# Altium PCB PR2019-DataAcquisitionSystem.PcbDoc
Units mm, origin at the board's own origin, x right, y up, seen from the top; angles counter-clockwise.
Board outline 36.7 x 28.3 mm, 2 copper layers (Top Layer, Bottom Layer), stack 1.569 mm thick; 52 components, 40 nets, 182 pads, 70 vias.
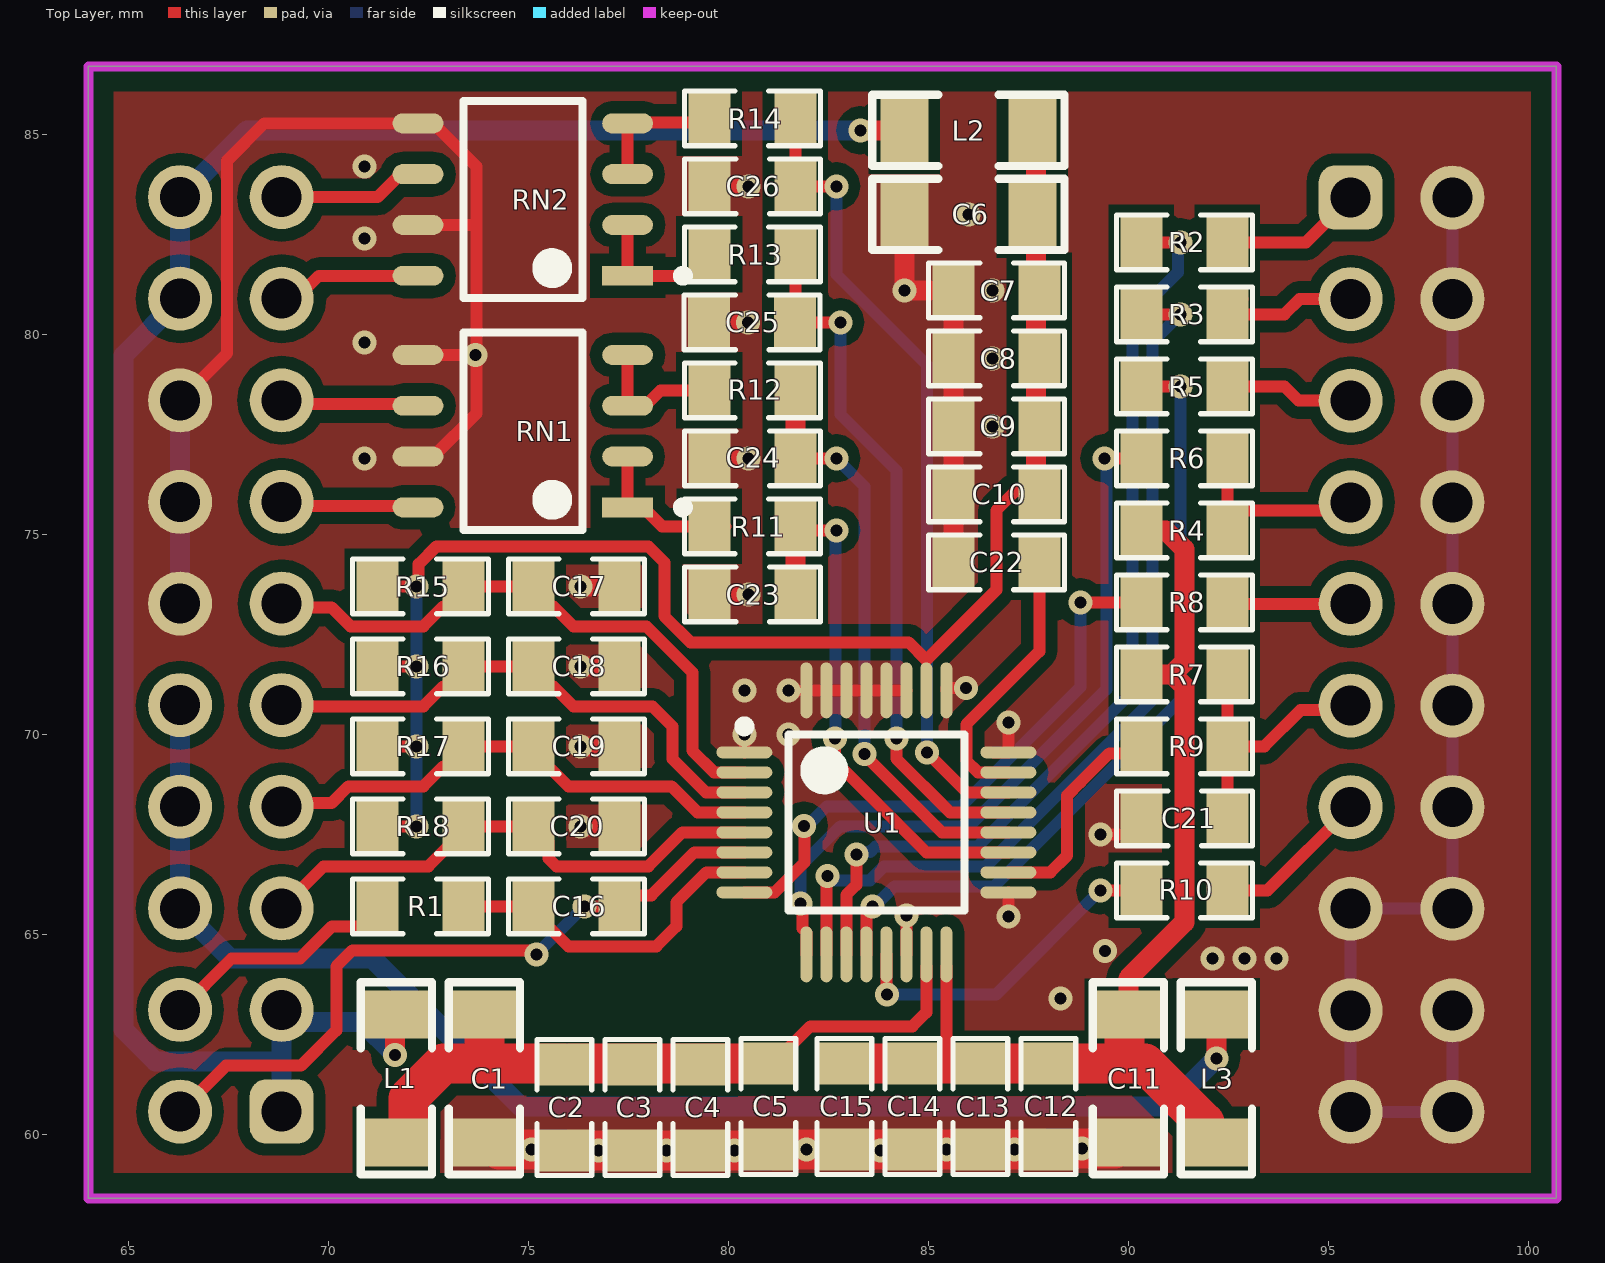
[diagram p0: Top Layer view]
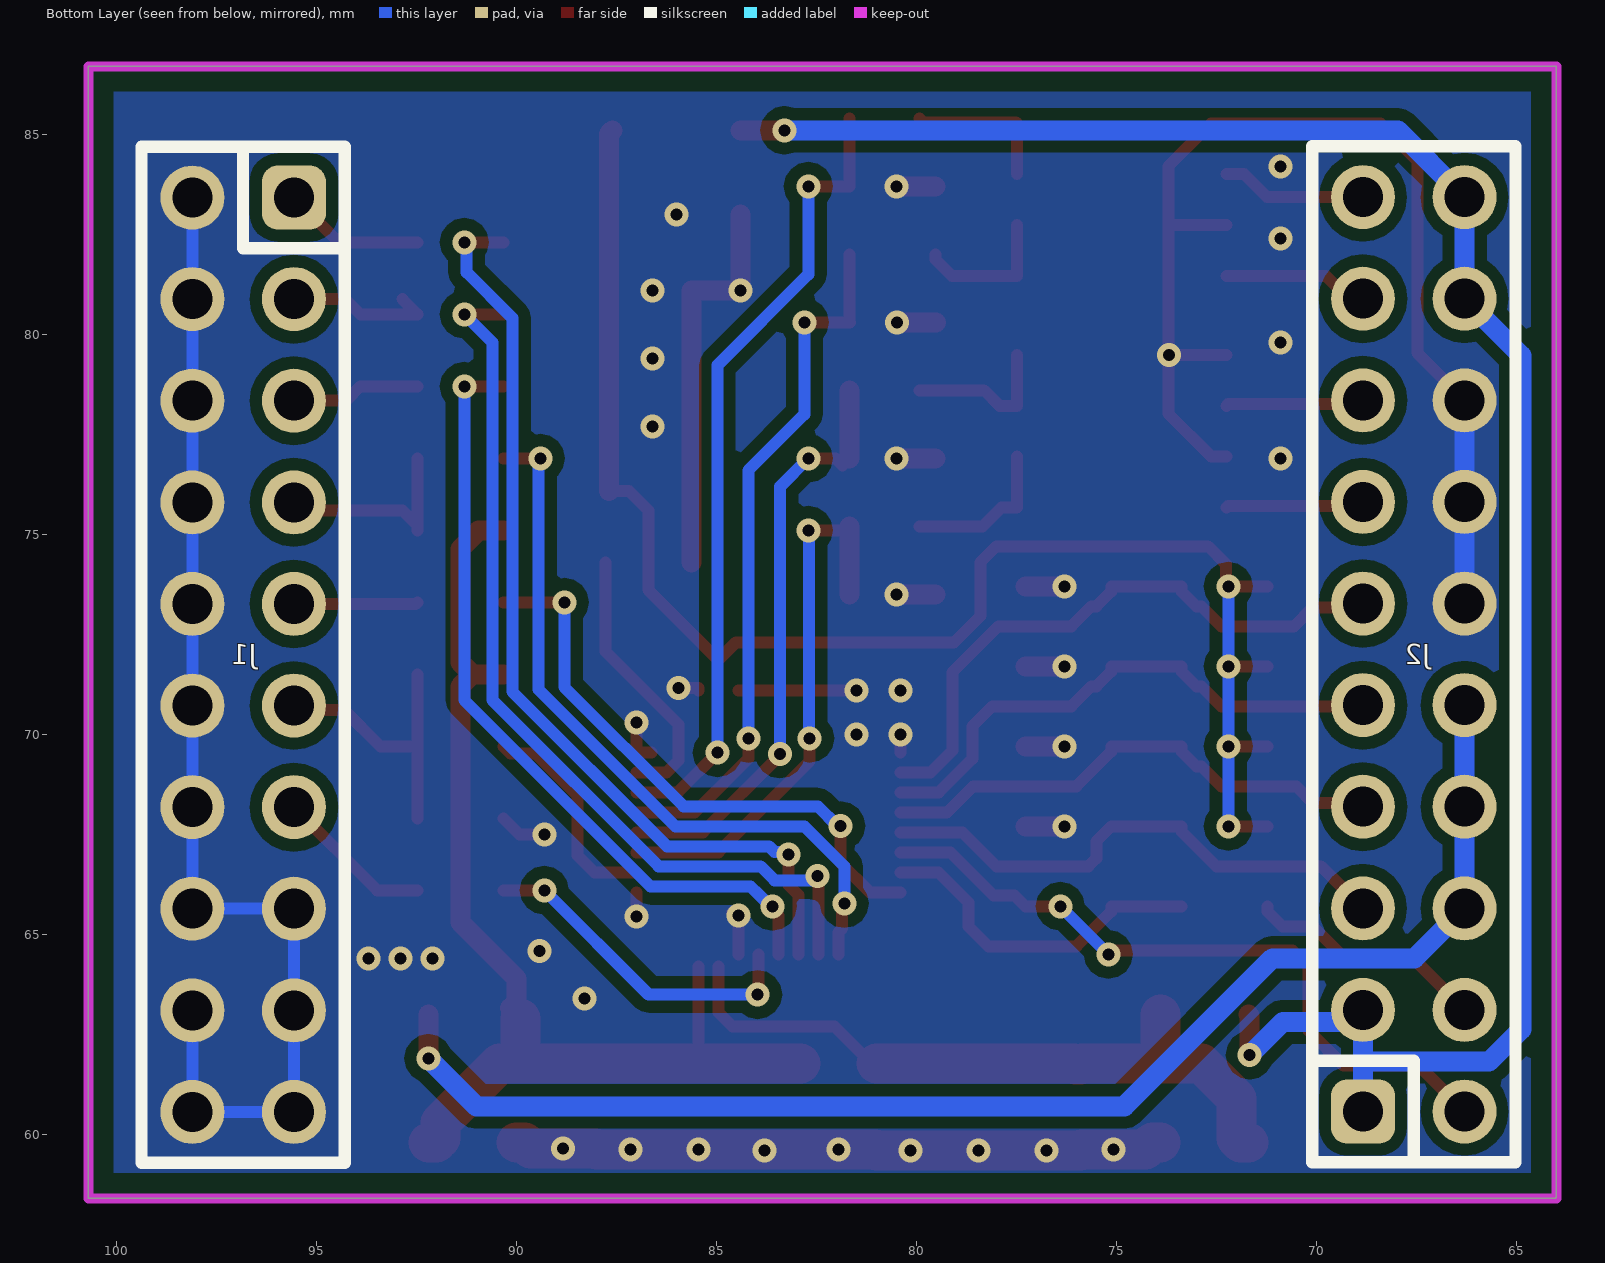
[diagram p1: Bottom Layer view, seen from below]
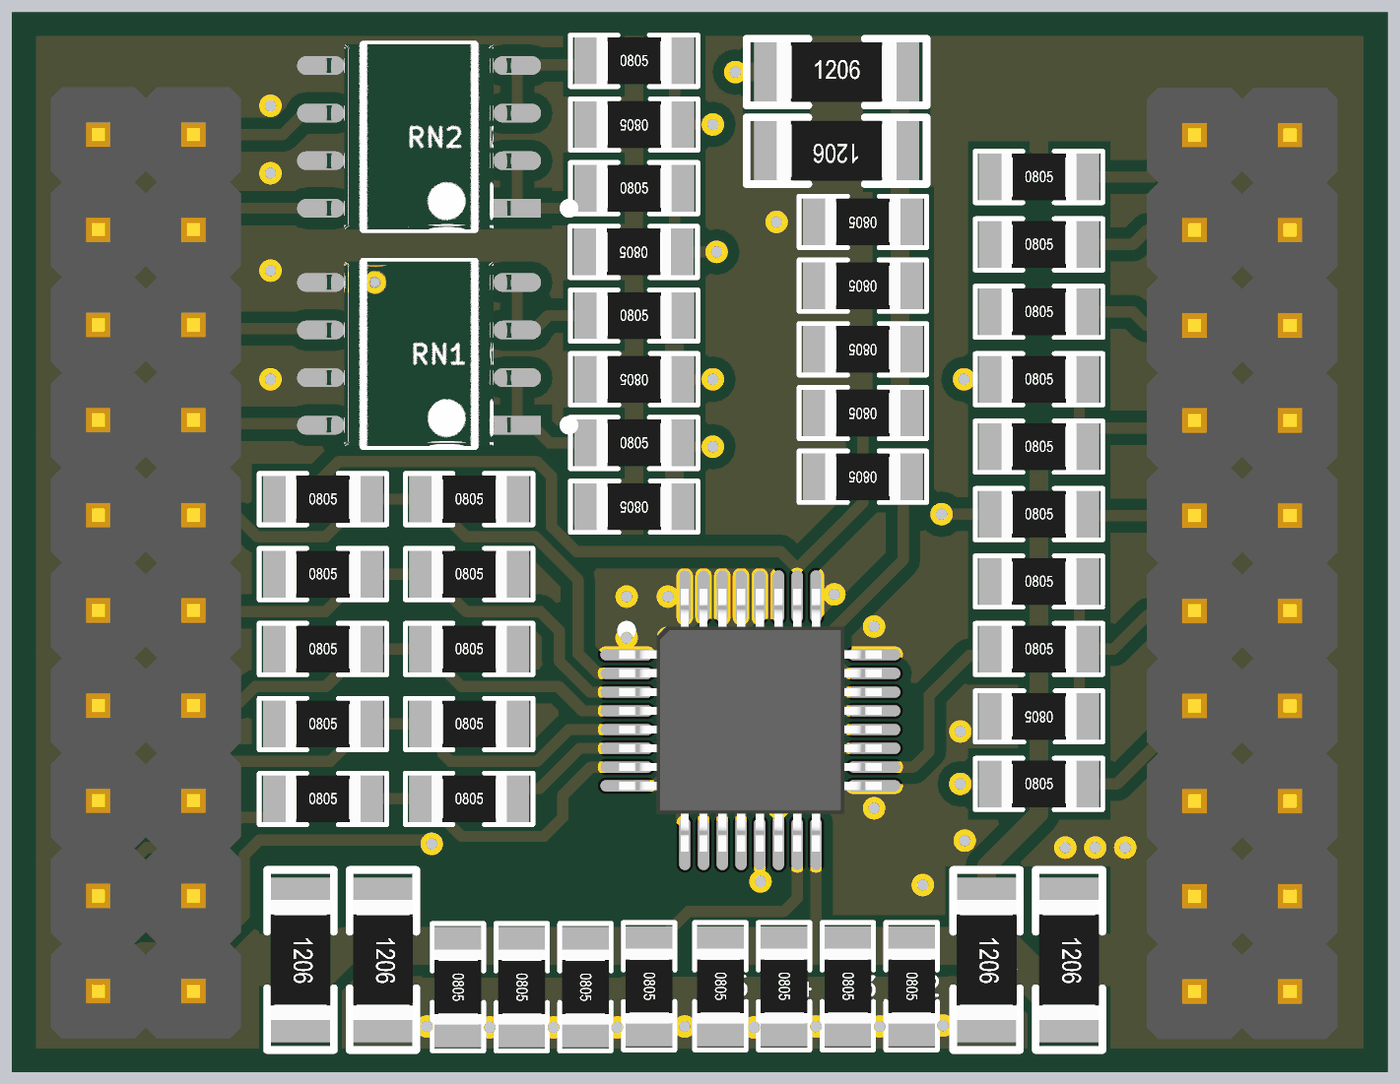
[diagram p2: 3D render of the assembled board from above, using the file's embedded part models]

## Layer stack, top to bottom
Top Solder: solder mask 0.0254, SM-001, Dk 4
Top Layer: signal copper 0.035
Dielectric 1: core 1.4986, Core-043, Dk 4.3
Bottom Layer: signal copper 0.035
Bottom Solder: solder mask 0.0254, SM-001, Dk 4

## Board outline
64,58.4 100.7,58.4 100.7,86.7 64,86.7

## Design rules (kind name [scope] priority, off if disabled: settings)
Clearance Keep-Poly [(OnLayer('Keep-Out Layer')) vs (InPoly)] p1: gap=0.5 ignorepadtopadclearanceinfootprint=FALSE
Clearance Polygon [All vs (InPoly)] p2: gap=0.3 ignorepadtopadclearanceinfootprint=FALSE
Clearance Keepout [All vs (OnLayer('Keep-Out Layer'))] p3: gap=0.5 ignorepadtopadclearanceinfootprint=FALSE
Clearance [All] p4: gap=0.2 ignorepadtopadclearanceinfootprint=FALSE
ComponentClearance [All] p1: gap=0.1 collisioncheckmode=3 verticalgap=0.2 showdistances=FALSE
FabricationTestPointUsage TestPointUsage [All] p1: valid=0 allowmultiple=FALSE
FabricationTestpoint Testpoint [All] p1: side=3 testpointundercomponent=TRUE minsize=1.016 maxsize=2.54 preferedsize=1.524 minholesize=0 maxholesize=1.016 preferedholesize=0.813 testpointgrid=0.025 allowsidetop=TRUE allowsidebottom=TRUE usegrid=TRUE gridtolerance=0
HoleSize [All] p1: absolutevalues=TRUE maxlimit=3.5 minlimit=0 maxpercent=80.000 minpercent=20.000
PlaneConnect [All] p1: planeconnectstyle=Direct reliefexpansion=0.508 reliefentries=4 reliefconductorwidth=0.254 reliefairgap=0.254
PolygonConnect PolygonConnect_1 [InNet('BAT+')] p1: connectstyle=Direct reliefconductorwidth=0.254 reliefentries=4 polygonreliefangle="90 Angle" airgapwidth=0.254
PolygonConnect [All] p2: connectstyle=Direct reliefconductorwidth=0.8 reliefentries=4 polygonreliefangle="90 Angle" airgapwidth=0.254
RoutingVias [All] p1: holewidth=0.3 width=0.6 viastyle="Through Hole" minholewidth=0.3 minwidth=0.6 maxholewidth=0.8 maxwidth=1.3
SolderMaskExpansion [(IsVia)] p1: expansion=-10 istentingtop=FALSE
Width SGND [InNet('SGND')] p1: maxlimit=2 minlimit=0.3 preferedwidth=0.5 minimp=50.000000 maximp=50.000000 favimp=50.000000
Width PGND [InNet('PGND')] p2: maxlimit=3 minlimit=0.5 preferedwidth=0.5 minimp=50.000000 maximp=50.000000 favimp=50.000000
Width [All] p3: maxlimit=2 minlimit=0.2 preferedwidth=0.2 minimp=50.000000 maximp=50.000000 favimp=50.000000
25 further rules are at their usual default settings.

## Components (designator, comment, footprint, x,y, rotation, side; value= is the part's Value field where it differs from the comment)
C1 "10uF X7R 50V" 1206 73.9,61.4 r270 top
C2 "100nF X7R 100V" 0805 75.9,60.675 r270 top
C3 "1nF X7R 50V" 0805 77.6,60.675 r270 top
C4 "100pF C0G 50V" 0805 79.3,60.675 r270 top
C5 "10pF C0G" 0805 81,60.7 r270 top
C6 "10uF X7R 50V" 1206 86,83 r180 top
C7 "100nF X7R 100V" 0805 86.7,81.1 r180 top
C8 "1nF X7R 50V" 0805 86.7,79.4 r180 top
C9 "100pF C0G 50V" 0805 86.7,77.7 r180 top
C10 "10pF C0G" 0805 86.7,76 r180 top
C11 "10uF X7R 50V" 1206 90,61.4 r270 top
C12 "100nF X7R 100V" 0805 88,60.7 r270 top
C13 "1nF X7R 50V" 0805 86.3,60.7 r270 top
C14 "100pF C0G 50V" 0805 84.6,60.7 r270 top
C15 "10pF C0G" 0805 82.9,60.7 r270 top
C16 "1nF X7R 50V" 0805 76.2,65.7 r0 top
C17 "1nF X7R 50V" 0805 76.2,73.7 r0 top
C18 "1nF X7R 50V" 0805 76.2,71.7 r0 top
C19 "1nF X7R 50V" 0805 76.2,69.7 r0 top
C20 "1nF X7R 50V" 0805 76.2,67.7 r0 top
C21 "100nF X7R 100V" 0805 91.4,67.9 r180 top
C22 "47uF X5R 6.3V" 0805 86.7,74.3 r180 top
C23 "1nF X7R 50V" 0805 80.6,73.5 r180 top
C24 "1nF X7R 50V" 0805 80.6,76.9 r180 top
C25 "1nF X7R 50V" 0805 80.587,80.3 r180 top
C26 "1nF X7R 50V" 0805 80.6,83.7 r180 top
J1 "ToMainBoard" IDC-20 96.83,71.99 r270 bottom
J2 "FromMainBoard" IDC-20 67.564,72 r90 bottom
L1 "80R 3A" 1206 71.7,61.4 r270 top
L2 "80R 3A" 1206 86,85.1 r0 top
L3 "80R 3A" 1206 92.2,61.4 r270 top
R1 "4K7" 0805 72.3,65.7 r0 top
R2 "47R" 0805 91.4,82.3 r0 top
R3 "47R" 0805 91.4,80.5 r0 top
R4 "100K" 0805 91.4,75.1 r0 top
R5 "47R" 0805 91.4,78.7 r0 top
R6 "47R" 0805 91.4,76.9 r0 top
R7 "100K" 0805 91.4,71.5 r0 top
R8 "47R" 0805 91.4,73.3 r0 top
R9 "47R" 0805 91.4,69.7 r0 top
R10 "47R" 0805 91.4,66.1 r0 top
R11 "4K7" 0805 80.6,75.2 r0 top
R12 "4K7" 0805 80.6,78.6 r0 top
R13 "4K7" 0805 80.6,82 r0 top
R14 "4K7" 0805 80.6,85.4 r0 top
R15 "10K" 0805 72.3,73.7 r0 top
R16 "10K" 0805 72.3,71.7 r0 top
R17 "10K" 0805 72.3,69.7 r0 top
R18 "10K" 0805 72.3,67.7 r0 top
RN1 "AORN100-1AT5" FP-AORN100-1AT5-IPC_C 74.862,77.58 r180 top value=1/100kΩ
RN2 "AORN100-1AT5" FP-AORN100-1AT5-IPC_C 74.862,83.37 r180 top value=1/100kΩ
U1 "ADS124S08IPBSR" LQFP-32_N 83.7,67.8 r0 top

## Footprints (in the part's own frame and the unit in brackets; to place one, negate y for a bottom-side part, rotate by r counter-clockwise, add the part's x,y. Pads: shape width x height; smd on the part's side, far side on the other; paste and mask are expansions set on the pad)
0805 [mm]
  rect 1.05x1.3 smd: 1(-1.075,0) 2(1.075,0)
  silkscreen extent -1.7,-0.69 1.7,0.69, body extent -1,-0.62 1,0.63, height 0.5
1206 [mm]
  rect 1.2x1.6 smd: 1(-1.6,0) 2(1.6,0)
  silkscreen extent -2.4,-0.89 2.4,0.89, body extent -1.6,-0.8 1.6,0.8, height 0.6
FP-AORN100-1AT5-IPC_C [mm]
  rect 1.269x0.499 smd paste+0 mask+0: 1(-2.62,1.905)
  rrect100% 1.269x0.499 smd paste+0 mask+0: 2(-2.62,0.635) 3(-2.62,-0.635) 4(-2.62,-1.905) 5(2.62,-1.905) 6(2.62,-0.635) 7(2.62,0.635) 8(2.62,1.905)
  silkscreen extent -4.13,-2.46 1.49,2.46, body extent -3.35,-2.57 3.35,2.57, height 0.25
IDC-20 [mm]
  rrect50% 1.6x1.6 hole 1: 1(-11.43,1.27)
  round 1.6 hole 1: 2(-11.43,-1.27) 3(-8.89,1.27) 4(-8.89,-1.27) 5(-6.35,1.27) 6(-6.35,-1.27) 7(-3.81,1.27) 8(-3.81,-1.27) 9(-1.27,1.27) 10(-1.27,-1.27) 11(1.27,1.27) 12(1.27,-1.27) 13(3.81,1.27) 14(3.81,-1.27) 15(6.35,1.27) 16(6.35,-1.27) 17(8.89,1.27) 18(8.89,-1.27) 19(11.43,1.27) 20(11.43,-1.27)
  silkscreen extent -12.7,-2.54 12.7,2.54, body extent -12.7,-2.53 12.7,2.55, height 1.5
LQFP-32_N [mm] "Thin QFP, 32-Leads, Body 5x5mm, Pitch 0.5mm, IPC Medium Density"
  oval 1.4x0.3 smd mask+0.07: 1(-3.3,1.75) 2(-3.3,1.25) 3(-3.3,0.75) 4(-3.3,0.25) 5(-3.3,-0.25) 6(-3.3,-0.75) 7(-3.3,-1.25) 8(-3.3,-1.75) 17(3.3,-1.75) 18(3.3,-1.25) 19(3.3,-0.75) 20(3.3,-0.25) 21(3.3,0.25) 22(3.3,0.75) 23(3.3,1.25) 24(3.3,1.75)
  oval 0.3x1.4 smd mask+0.07: 9(-1.75,-3.3) 10(-1.25,-3.3) 11(-0.75,-3.3) 12(-0.25,-3.3) 13(0.25,-3.3) 14(0.75,-3.3) 15(1.25,-3.3) 16(1.75,-3.3) 25(1.75,3.3) 26(1.25,3.3) 27(0.75,3.3) 28(0.25,3.3) 29(-0.25,3.3) 30(-0.75,3.3) 31(-1.25,3.3) 32(-1.75,3.3)
  silkscreen extent -3.42,-2.2 2.2,2.52, body extent -3.5,-3.5 3.5,3.5, height 1.1

## Part data
C1 C6 C11: library part "CAP_10uF X7R 50V_1206", "Capacità", 1 Supplier Part Number=CL31B106KBHNNNE, ArSilicii Part Number=CPC0232011, 1 Supplier="ARROW ELECTRONICS ITALIA S.R.L.", ComponentLink1Description="Datasheet for 10uF X7R 25V", Manufacturer Part Number=CL31B106KBHNNNE, SMD/TH=SMD
C2 C7 C12 C21: library part "CAP_100nF X7R 100V_0805", "Capacità", 1 Supplier Part Number=CL21B104KCFSFNG, 2 Supplier Part Number=1907331, ArSilicii Part Number=CPC0213101, Manufacturer=SAMSUNG, 1 Supplier="ARROW ELECTRONICS ITALIA S.R.L.", 2 Supplier="FARNELL ITALIA S.R.L.", Manufacturer Part Number=CL21B104KCFSFNG, SMD/TH=SMD
C3 C8 C13 C16 C17 C18 C19 C20 C23 C24 C25 C26: library part "CAP_1nF X7R 50V_0805", "Capacità", 1 Supplier Part Number=B37941K5102K60, 2 Supplier Part Number=0805B102K5CT, ArSilicii Part Number=CPC0213001, Manufacturer="EPCOS / TDK", 1 Supplier="DISTAR S.R.L.", 1 Supplier Unit Price=0,00235, 2 Supplier="ARROW ELECTRONICS ITALIA S.R.L.", Manufacturer Part Number=B37941K5102K60, SMD/TH=SMD
C4 C9 C14: library part "CAP_100pF C0G 50V_0805", "Capacità", 1 Supplier Part Number=CC0805JRNPO9BN101, ArSilicii Part Number=CPC0614100, Manufacturer=YAGEO, 1 Supplier="ARROW ELECTRONICS ITALIA S.R.L.", 1 Supplier Unit Price=0,09, Manufacturer Part Number=CC0805JRNPO9BN101, SMD/TH=SMD
C5 C10 C15: library part "CAP_10pF C0G_0805", "Capacità", ArSilicii Part Number=CPC0614010, 1 Supplier Unit Price=0,09, SMD/TH=SMD
C22: library part "CAP_47uF X5R 6.3V_0805", "Capacità", 1 Supplier Part Number=81-GRM21BR60J476ME5L, 2 Supplier Part Number=846-7322, Manufacturer="Murata Electronics", Manufacturer Part Number=GRM21BR60J476ME15L, 1 Supplier=MOUSER, 1 Supplier Unit Price=0,161, 2 Supplier=RS, 2 Supplier Unit Price=0,176, ComponentLink1Description=Datasheet, ComponentLink1URL=http://www.mouser.com/ds/2/281/c02e-2905.pdf, SMD/TH=SMD, Supplier 1=Mouser, Supplier 2=Digi-Key, Supplier Part Number 1=81-GRM21BR60J476ME5L, Supplier Part Number 2=490-9960-1-ND
J1 J2: library part "HEADER 10X2", SMD/TH=TH, System=Connector
L1 L2 L3: library part "Ferrite 80R 3A", "Ferrite", 1 Supplier Part Number=3275550P, ArSilicii Part Number=CPF0006000, Manufacturer="Wurth Elektronik", Manufacturer Part Number=74279215, Supplier Part Number 1=732-1629-1-ND, 1 Supplier="RS COMPONENTS S.P.A.", 1 Supplier Unit Price=0,21000, ComponentLink1Description="Datasheet for Ferrite 80R 3A", ComponentLink1URL=http://docs-europe.electrocomponents.com/webdocs/0033/0900766b80033a26.pdf, SMD/TH=SMD, Supplier 1=Digi-Key
R1 R2 R3 R4 R5 R6 R7 R8 R9 R10 R11 R12 R13 R14 R15 R16 R17 R18: library part RES_SMD, "Resistenza", SMD/TH=SMD
RN1 RN2: library part CMP-02406-000003-1, "RES NETWORK 4 RES MULT OHM 8SOIC", Manufacturer=Vishay, Number Of Resistors=4, Power Per Resistor=100mW, Power Rating=400mW, Resistance=1/100kΩ, Temperature="-55°C to +155°C", Temperature Coefficient=25ppm/°C, Temperature Range High=+155°C, Temperature Range Low=-55°C, Tolerance=0.1%, Automotive=Yes, Automotive Grade="Grade 0", Category=Res, ComponentLink2Description=Datasheet, ComponentLink2URL=https://www.vishay.com/docs/60127/aorn.pdf, Composition="Thin Film", Device Class L1="Passive Components", Device Class L2=Resistors, Device Class L3="Resistor Arrays", Digikey Description="RES NETWORK 4 RES MULT OHM 8SOIC", Height=1.73mm, Ipc Land Pattern Name=SOIC127P607X173-8, Lead Free=Yes, Manufacturer Part Number=AORN100-1AT5, Octopart=https://octopart.com/aorn1001at5-vishay-54384707, Package=AORN100-1AT5, RoHS=TRUE, Series=AORN, Standoff Height=0.1524mm, Termination=Gull-Wing

## Via types
v1: diameter 0.6, hole 0.3, Top Layer to Bottom Layer, 70 vias

## Nets (pads, with @x,y where several pads share a name; then routed paths per layer and width w, separated by ;. In a path a pad name is that pad's centre, name@x,y a point inside that pad or via, vN(x,y) a via of type N, cw(c..) or ccw(c..) an arc to the next point about the centre after c; other vN are vias at no path point)
+3V3: J2.6 J2.8 J2.10 L3.1 | length 34.6
  Top Layer w0.5: v1(92.2,61.9) L3.1
  Bottom Layer w0.5: J2.10 J2.8 J2.6 67.544,64.4 71.1,64.4 74.8,60.7 91,60.7 v1(92.2,61.9)
+5V0: J2.1 J2.3 J2.18 J2.20 L1.1 L2.1 | length 51.2
  Top Layer w0.5: v1(71.667,61.981) 71.667,62.967 L1.1 ; v1(83.3,85.1) L2.1
  Bottom Layer w0.5: J2.1 68.834,61.84 ; J2.3@68.834,62.81 70.838,62.81 v1(71.667,61.981) ; J2.3 68.834,61.84 ; v1(83.3,85.1) 67.964,85.1 J2.20 J2.18 64.877,79.473 64.877,62.623 65.68,61.82 68.814,61.82 68.834,61.84
AVDD: C6.1 C7.1 C8.1 C9.1 C10.1 L2.2 R15.1 R16.1 R17.1 R18.1 U1.26 | length 40
  Top Layer w0.3: R18.1 v1(72.2,67.7) ; R17.1 v1(72.2,69.7) ; R16.1 v1(72.2,71.7) ; R15.1 v1(72.2,73.7) 72.257,73.757 72.257,74.252 72.705,74.7 78,74.7 78.4,74.3 78.4,72.955 79.055,72.3 84.507,72.3 84.95,71.857 86.7,73.607 86.7,75.6 87.188,76.088 C10.1@87.687,76.088
  Top Layer w0.5: L2.2 87.687,85.013 87.687,83 87.687,81.1 87.687,79.4 87.687,77.7 C10.1@87.687,76.088
  Bottom Layer w0.3: v1(72.2,67.7) v1(72.2,69.7) v1(72.2,71.7) v1(72.2,73.7)
Cs: J1.7 R4.2 R6.2 | length 5.1
  Top Layer w0.3: R4.2 R4.2@92.475,75.225 ; R6.2 R4.2@92.475,75.225 ; J1.7 95.36,75.6 92.85,75.6 R4.2@92.475,75.225
Din: J1.3 R3.2 | length 3.8
  Top Layer w0.3: R3.2@92.85,80.88 92.475,80.505 R3.2 93.9,80.5 94.28,80.88 J1.3
Dout: J1.5 R5.2 | length 3.2
  Top Layer w0.3: R5.2 93.9,78.7 94.26,78.34 J1.5
Drdy: J1.13 R10.2 | length 3.9
  Top Layer w0.3: R10.2 93.48,66.1 J1.13
DVDD: C11.1 C12.1 C13.1 C14.1 C15.1 L3.2 R4.1 R7.1 U1.16 | length 28.7
  Top Layer w0.3: 85.45,61.775 U1.16@85.45,64.2
  Top Layer w0.5: C11.1@89.9,62.9 C11.1 90.157,63.157 90,63.314 90,63.9 91.4,65.3 91.4,71.2 91.1,71.5 ; R7.1 91.1,71.5 ; R4.1 90.335,75.09 90.943,75.09 91.4,74.634 91.4,71.8 91.1,71.5
  Top Layer w1: C15.1 C14.1 85.45,61.775 C13.1 C12.1 89.9,61.775 ; C11.1@89.9,62.9 89.9,61.775 ; L3.2 92,59.8 91.9,59.9 91.9,60.29 90.415,61.775 89.9,61.775
GND: C1.2 C2.2 C3.2 C4.2 C5.2 C6.2 C7.2 C8.2 C9.2 C10.2 C11.2 C12.2 C13.2 C14.2 C15.2 C17.2 C18.2 C19.2 C20.2 C21.2 C22.2 C23.2 C24.2 C25.2 C26.2 J1.2 J1.4 J1.6 J1.8 J1.10 J1.12 J1.14 J1.15 J1.16 J1.17 J1.18 J1.19 J1.20 J2.12 J2.14 J2.16 RN1.5 RN1.7 RN2.5 RN2.7 U1.1 U1.14 U1.17 U1.24 U1.25 U1.27 U1.28 U1.29 U1.30 U1.31 U1.32 | length 102.1
  Top Layer w0.3: J2.16 67.471,79.527 67.471,84.346 68.4,85.275 RN2.5 72.627,85.275 73.7,84.202 73.7,82.7 ; RN1.7 72.627,76.945 73.7,78.017 v1@73.7,79.5 ; RN1.5 v1(73.685,79.485) v1@73.7,79.5 ; RN2.7 73.665,82.735 73.7,82.7 ; U1.1 v1(80.4,70) ; v1(81.5,71.1) U1.32 U1.31 U1.30 U1.29 U1.28 U1.27 ; U1.14 v1(84.45,65.469) 84.531,65.469 v1@84.612,65.55 ; U1.25 85.45,71.16 v1(85.94,71.16) ; U1.24@86.626,69.55 U1.24 v1(87,70.3) ; v1(87,65.45) U1.17 ; v1(89.3,67.5) 89.925,67.5 C21.2 ; v1@73.7,79.5 73.7,82.7
  Top Layer w0.5: v1(76.3,67.7) C20.2 ; v1(76.3,69.7) C19.2 ; v1(76.3,71.7) C18.2 ; v1(76.3,73.7) C17.2 ; C25.2 v1(80.487,80.3) ; C23.2 v1(80.5,73.5) ; C24.2 v1(80.5,76.9) ; C26.2 v1(80.5,83.7) ; C6.2 v1(84.4,81.1) C7.2 C8.2 C9.2 C10.2 C22.2
  Top Layer w1: C1.2 74.1,59.8 74.275,59.625 75.875,59.625 C2.2 C3.2 C4.2 81,59.6 81.025,59.625 C14.2 C13.2 C12.2 88.025,59.65 89.65,59.65 89.8,59.8 C11.2
  Bottom Layer w0.3: J1.18 J1.20 J1.19 J1.17 J1.15 J1.16 J1.14 J1.12 J1.10 J1.8 J1.6 J1.4 J1.2
  Bottom Layer w0.5: J2.12 J2.14 J2.16
  other v1: 76.75,59.6 78.45,59.6 80.15,59.6 83.8,59.6 75.075,59.625 81.95,59.625 85.45,59.625 87.15,59.625 88.837,59.65 88.3,63.4 92.1,64.4 92.9,64.4 93.7,64.4 89.418,64.585 81.5,70 80.4,71.1 70.9,76.9 86.6,77.7 86.6,79.4 70.9,79.8 86.6,81.1 70.9,82.4 86,83 70.9,84.2
IOVDD: C1.1 C2.1 C3.1 C4.1 C5.1 L1.2 U1.15 | length 17.6
  Top Layer w0.3: C5.1 81.125,61.775 82.05,62.7 84.6,62.7 84.95,63.05 U1.15@84.95,64.2
  Top Layer w1: L1.2 71.9,59.8 72,59.9 72,60.9 72.875,61.775 73.9,61.775 ; C1.1 73.9,61.775 ; C5.1 79.3,61.775 77.6,61.775 76.05,61.775 76.025,61.75 C2.1 75.875,61.775 73.9,61.775
NetC16_1: C16.1 R1.2 U1.7 | length 8.6
  Top Layer w0.3: R1.2 C16.1 75.125,65.575 76,64.7 78.2,64.7 78.7,65.2 78.7,65.8 79.45,66.55 U1.7
NetC22_1: C22.1 U1.23 | length 6.9
  Top Layer w0.3: U1.23 86.243,69.05 85.95,69.343 85.95,70.25 87.775,72.075 C22.1
NetC23_1: C23.1 R11.2 U1.19 | length 13.8
  Top Layer w0.3: R11.2 81.775,75.1 v1(82.7,75.1) ; v1(82.669,69.9) 82.669,69.331 84.95,67.05 U1.19
  Top Layer w0.5: C23.1 R11.2
  Bottom Layer w0.3: v1(82.669,69.9) 82.684,69.916 82.684,75.084 v1(82.7,75.1)
NetC24_1: C24.1 R12.2 U1.20 | length 15
  Top Layer w0.3: C24.1 81.849,76.726 82.024,76.9 v1(82.7,76.9) ; v1(83.409,69.509) 83.409,69.476 85.336,67.55 U1.20
  Top Layer w0.5: C24.1 R12.2
  Bottom Layer w0.3: v1(82.7,76.9) 83.409,76.191 v1(83.409,69.509)
NetC25_1: C25.1 R13.2 U1.21 | length 17.7
  Top Layer w0.3: R13.2 81.675,80.312 C25.1 v1(82.8,80.3) ; v1(84.2,69.9) 84.2,69.393 85.543,68.05 U1.21
  Bottom Layer w0.3: v1(82.8,80.3) 82.8,78 84.2,76.6 v1(84.2,69.9)
NetC26_1: C26.1 R14.2 U1.22 | length 20.3
  Top Layer w0.3: R14.2 C26.1 v1(82.7,83.7) ; v1(84.972,69.54) 85.962,68.55 U1.22
  Bottom Layer w0.3: v1(82.7,83.7) 82.7,81.5 84.972,79.228 v1(84.972,69.54)
NetR2_1: R2.1 U1.11 | length 23.9
  Top Layer w0.3: U1.11 82.95,65.431 82.95,65.986 83.2,66.236 v1(83.2,67) ; R2.1 v1(91.3,82.3)
  Bottom Layer w0.3: v1(83.2,67) 83.257,67.057 83.542,67.057 83.684,67.2 86.233,67.2 90.1,71.067 90.1,80.409 91.243,81.552 91.243,82.243 v1(91.3,82.3)
NetR3_1: R3.1 U1.10 | length 22.9
  Top Layer w0.3: U1.10 82.45,65.224 82.45,66.431 v1(82.475,66.456) ; R3.1 v1(91.3,80.5)
  Bottom Layer w0.3: v1(82.475,66.456) 82.581,66.35 83.541,66.35 83.891,66.7 86.441,66.7 90.6,70.859 90.6,79.8 v1(91.3,80.5)
NetR5_1: R5.1 U1.12 | length 19.9
  Top Layer w0.3: U1.12 83.45,65.469 83.6,65.619 v1(83.6,65.7) ; R5.1 v1(91.3,78.7)
  Bottom Layer w0.3: v1(83.6,65.7) 83.648,65.7 83.943,65.995 84.148,66.2 86.648,66.2 91.3,70.852 v1(91.3,78.7)
NetR6_1: R6.1 U1.9 | length 18.5
  Top Layer w0.3: v1(81.8,65.774) 81.857,65.716 81.857,65.143 81.95,65.05 U1.9 ; v1(89.4,76.9) R6.1
  Bottom Layer w0.3: v1(81.8,65.774) 81.8,66.7 82.8,67.7 86.026,67.7 89.45,71.124 89.45,76.85 v1(89.4,76.9)
NetR8_1: R8.1 U1.8 | length 14.7
  Top Layer w0.3: U1.8 81.157,66.05 81.9,66.793 81.9,67.7 v1(81.89,67.71) ; v1(88.8,73.3) R8.1
  Bottom Layer w0.3: v1(81.89,67.71) 81.97,67.71 82.461,68.2 85.819,68.2 88.8,71.181 v1(88.8,73.3)
NetR9_1: R9.1 U1.18 | length 5.5
  Top Layer w0.3: U1.18 88.05,66.55 88.467,66.967 88.467,68.467 88.8,68.8 89.526,69.526 90.151,69.526 R9.1
NetR10_1: R10.1 U1.13 | length 8.4
  Top Layer w0.3: U1.13 83.95,63.515 v1(83.97,63.495) ; v1(89.3,66.1) R10.1
  Bottom Layer w0.3: v1(83.97,63.495) 86.695,63.495 v1(89.3,66.1)
NetR11_1: R11.1 RN1.1 RN1.2 | length 3.9
  Top Layer w0.3: RN1.2 RN1.1 77.867,75.675 78.342,75.2 R11.1@79.925,75.2
NetR12_1: R12.1 RN1.3 RN1.4 | length 3.9
  Top Layer w0.3: RN1.4 RN1.3 77.921,78.215 78.307,78.6 R12.1@79.925,78.6
NetR13_1: R13.1 RN2.1 RN2.2 | length 3.6
  Top Layer w0.3: RN2.2 RN2.1 79.115,81.465 79.525,81.875 R13.1
NetR14_1: R14.1 RN2.3 RN2.4 | length 3.8
  Top Layer w0.3: RN2.3 RN2.4 77.508,85.3 79.825,85.3 R14.1@79.925,85.4
Out_Current1: J2.19 RN2.6 | length 3.6
  Top Layer w0.3: J2.19 71.23,83.43 71.805,84.005 RN2.6
Out_Current2: J2.17 RN2.8 | length 3.6
  Top Layer w0.3: J2.17 69.186,80.89 69.76,81.465 RN2.8
Out_Current3: J2.15 RN1.6 | length 3.5
  Top Layer w0.3: J2.15 68.931,78.253 72.204,78.253 RN1.6
Out_Current4: J2.13 RN1.8 | length 3.5
  Top Layer w0.3: J2.13 68.931,75.713 72.204,75.713 RN1.8
Pwr_+: J2.4 R1.1 | length 6.1
  Top Layer w0.3: J2.4 67.584,64.4 69.293,64.4 70.093,65.2 70.85,65.2 71.225,65.575 R1.1
Pwr_-: C16.2 J2.2 U1.6 | length 17.9
  Top Layer w0.3: J2.2 67.444,61.72 69.32,61.72 70.2,62.6 70.2,64.2 70.6,64.6 v1@75.2,64.6 ; v1@75.142,64.557 v1(75.2,64.5) ; v1(76.4,65.7) C16.2 77.549,65.974 78.074,65.974 79.15,67.05 U1.6
  Bottom Layer w0.3: v1(75.2,64.5) v1(76.4,65.7)
Reset: C21.1 J1.11 R7.2 R9.2 | length 7.1
  Top Layer w0.3: C21.1 R9.2 ; R7.2 R9.2 ; J1.11 95.45,70.61 94.31,70.61 93.4,69.7 R9.2
Sclk: J1.1 R2.2 | length 3.5
  Top Layer w0.3: R2.2 94.44,82.3 J1.1
Start: J1.9 R8.2 | length 3.1
  Top Layer w0.3: R8.2 92.515,73.26 J1.9
Temperature1: C20.1 J2.5 R18.2 U1.5 | length 13.5
  Top Layer w0.3: J2.5 69.884,66.7 72.5,66.7 73.375,67.575 R18.2 C20.1 75.5,67.325 75.5,66.9 75.7,66.7 76.605,66.7 78,66.7 78.85,67.55 U1.5
Temperature2: C19.1 J2.7 R17.2 U1.4 | length 13
  Top Layer w0.3: J2.7 68.928,68.284 70.084,68.284 70.5,68.7 72.375,68.7 72.875,69.2 73,69.2 73.375,69.575 R17.2 C19.1 75.125,69.575 76,68.7 78.579,68.7 79.229,68.05 U1.4
Temperature3: C18.1 J2.9 R16.2 U1.3 | length 13.9
  Top Layer w0.3: J2.9 68.864,70.7 72.375,70.7 72.875,71.2 73,71.2 73.375,71.575 R16.2 C18.1 75.125,71.575 75.5,71.2 75.625,71.2 76.125,70.7 78.1,70.7 78.6,70.2 78.6,69.386 79.436,68.55 U1.3
Temperature4: C17.1 J2.11 R15.2 U1.2 | length 15.4
  Top Layer w0.3: J2.11 68.933,73.171 70.084,73.171 70.555,72.7 72.375,72.7 72.875,73.2 73,73.2 73.375,73.575 R15.2 C17.1 75.125,73.575 75.5,73.2 75.625,73.2 76.125,72.7 77.945,72.7 77.948,72.7 79.1,71.548 79.1,69.593 79.643,69.05 U1.2

## Polygon pours and split planes (outlines as drawn)
no net on Bottom Layer "NONET_L02_P002" (solid, remove dead copper, pour order 2): 64,86.7 100.7,86.7 100.7,58.4 64,58.4
GND on Bottom Layer "GND_L02_P001" (solid, pour order 1): 64,86.7 100.7,86.7 100.7,58.4 64,58.4
GND on Top Layer "GND_L01_P000" (solid, remove dead copper, pour order 0): 64,86.7 100.7,86.7 100.7,58.4 64,58.4

## Keep-outs
Keep-Out Layer:
  the board outline again, w0.254